# Altium PCB FPV0-3.PcbDoc (part 4 of 6)
Units mm, origin at the board's own origin, x right, y up, seen from the top; angles counter-clockwise.
Board outline 81.28 x 53.34 mm, 4 copper layers (Top Layer, GND Plane 1, 3v3 Plane 2, Bottom Layer); 178 components, 250 nets, 836 pads, 217 vias.
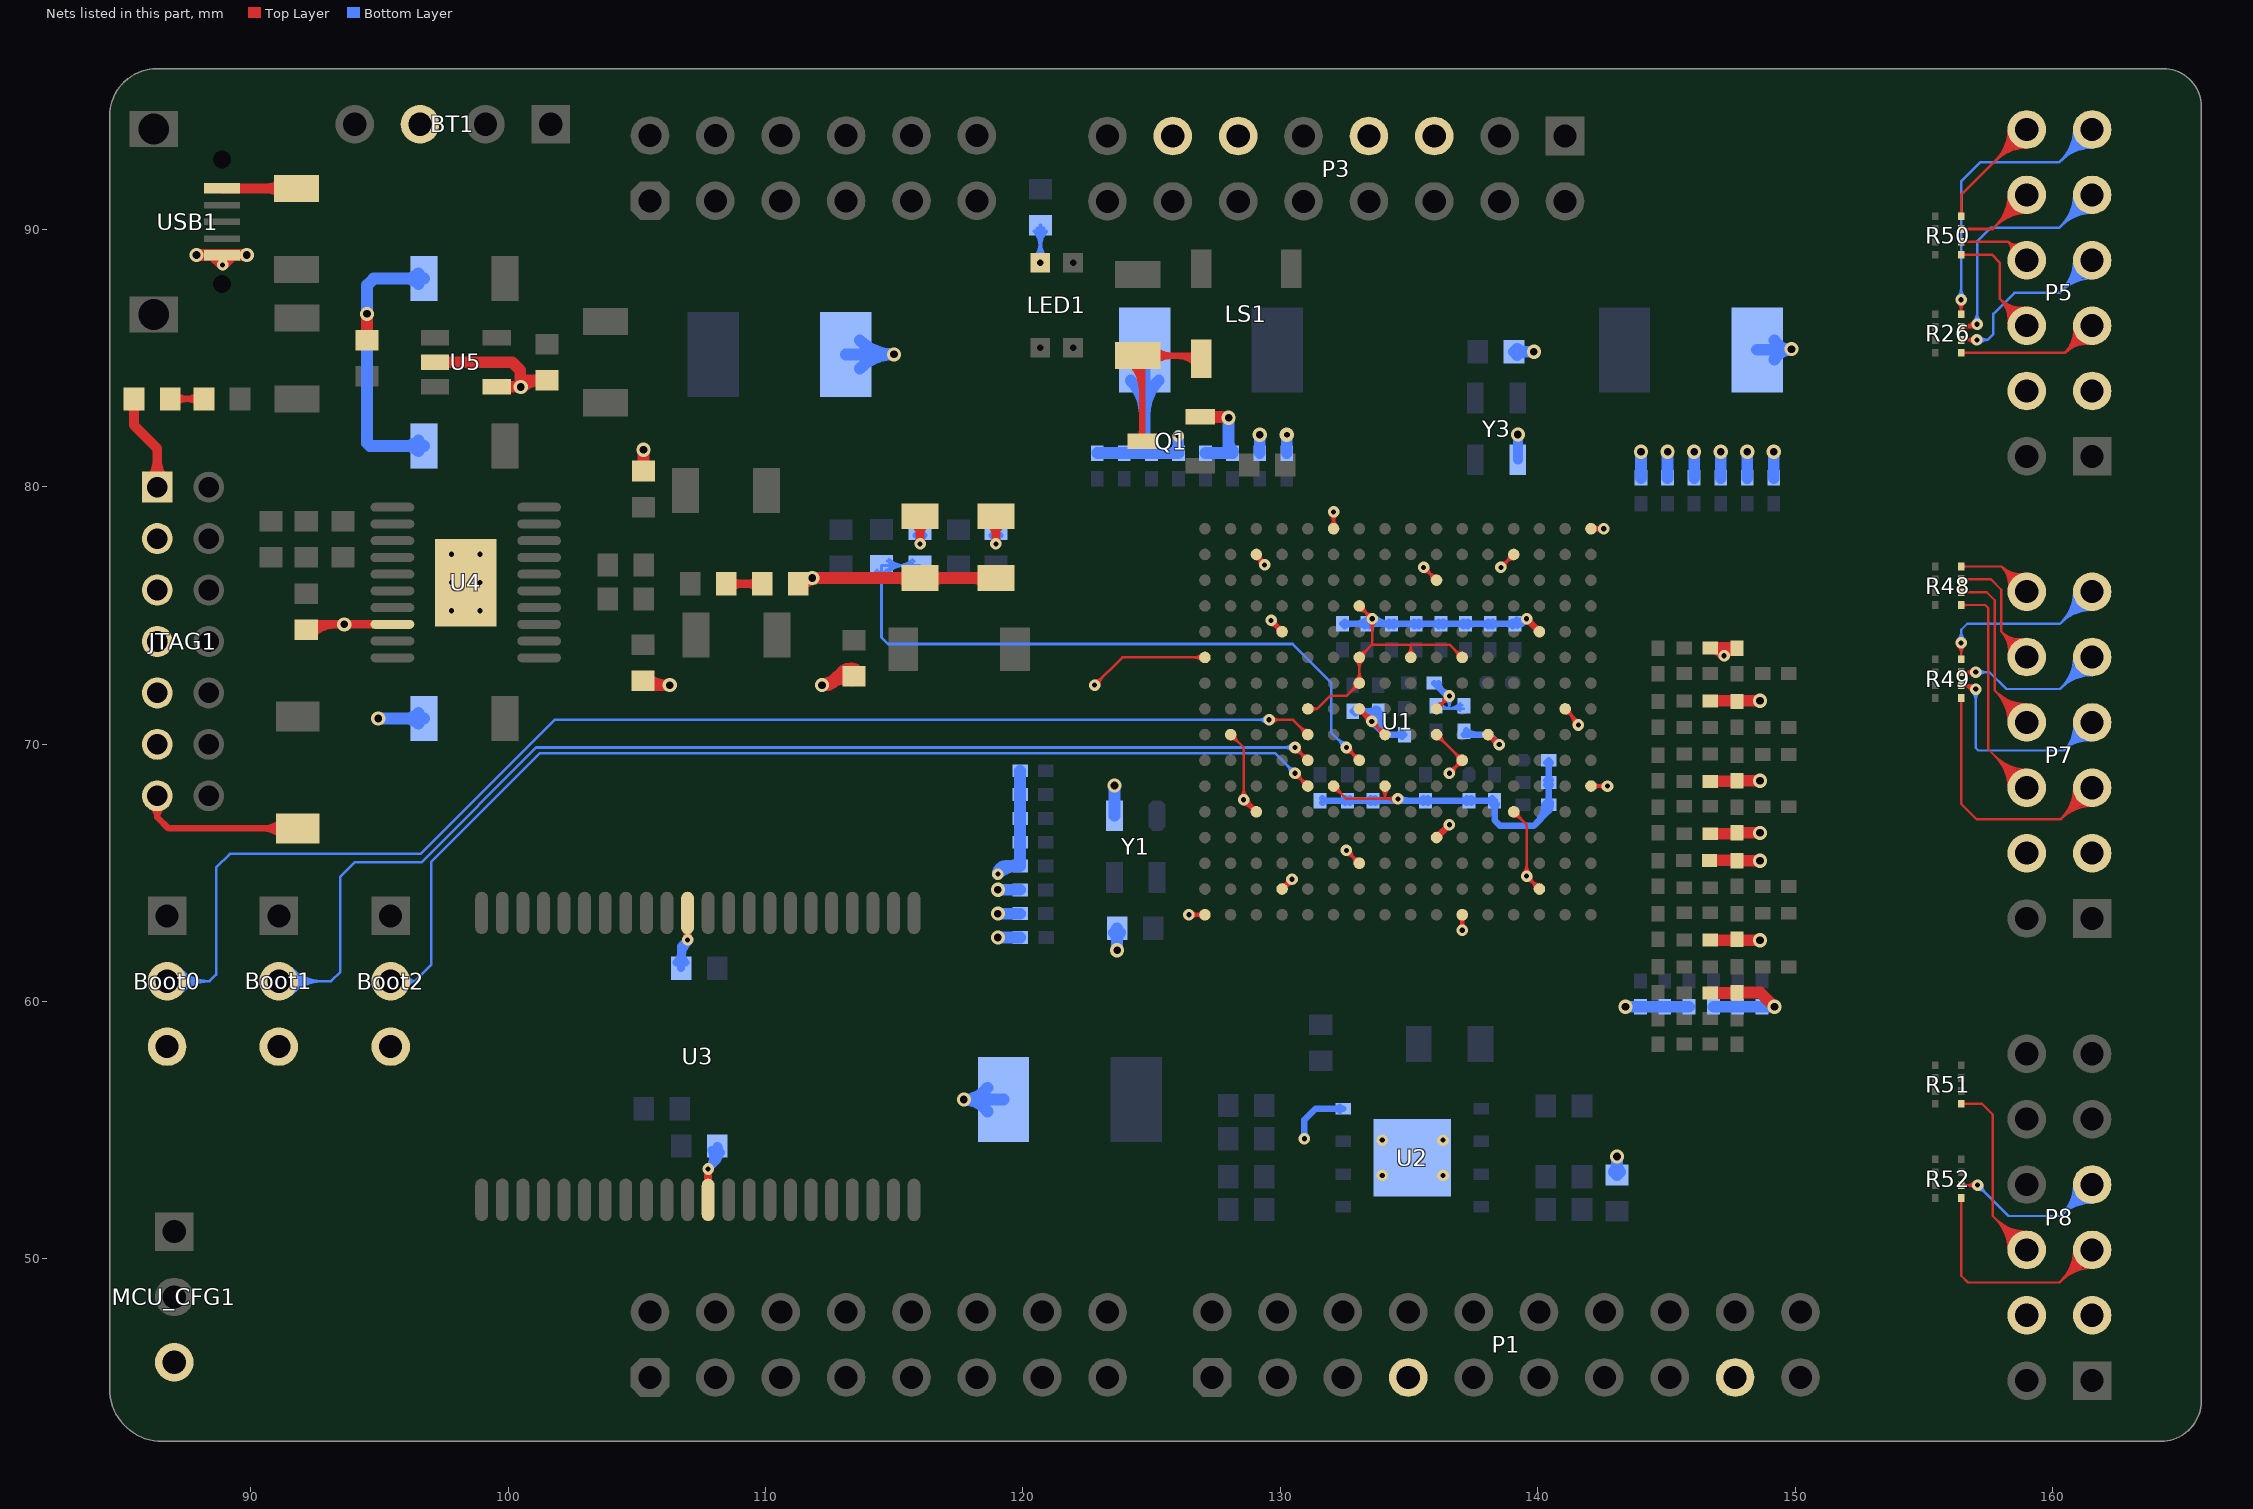
[diagram p6: the nets of this part, all layers, seen from the top]

## Via types
v1: diameter 0.45, hole 0.2, Top Layer to Bottom Layer, tented both sides, 150 vias
v2: diameter 0.55, hole 0.3, Top Layer to Bottom Layer, tented both sides, 55 vias
v3: diameter 0.45, hole 0.2, Top Layer to Bottom Layer, 6 vias
v4: diameter 0.666, hole 0.4, Top Layer to Bottom Layer, tented both sides, 4 vias
v5: diameter 0.513, hole 0.3, Top Layer to Bottom Layer, tented both sides, 1 vias
v6: diameter 0.55, hole 0.23, Top Layer to Bottom Layer, tented both sides, 1 vias

## Nets (pads, with @x,y where several pads share a name; then routed paths per layer and width w, separated by ;. In a path a pad name is that pad's centre, name@x,y a point inside that pad or via, vN(x,y) a via of type N, cw(c..) or ccw(c..) an arc to the next point about the centre after c; other vN are vias at no path point) (continued)
GND: Boot0.3 Boot1.3 Boot2.3 BT1.3 C1.2 C2.1 C3.2 C4.2 C5.2 C6.2 C7.2 C8.1 C9.2 C10.2 C11.2 C12.2 C14.2 C15.2 C16.2 C17.2 C18.2 C19.2 C20.2 C22.2 C23.2 C24.2 C25.2 C26.2 C27.2 C28.1 C29.2 C30.2 C31.2 C32.2 C33.2 C34.2 C35.1 C36.2 C37.2 C38.2 C39.2 C40.2 C41.2 C42.2 C43.2 C44.2 C45.2 C46.2 C47.2 C48.2 C49.2 C50.2 C51.2 C52.2 C53.2 C54.2 C55.2 C56.2 C60.1 C61.2 C62.1 C63.2 C64.2 C65.2 C68.1 D6.1 D7.1 D8.1 FB2.1 JTAG1.1 JTAG1.3 JTAG1.5 JTAG1.7 JTAG1.9 JTAG1.11 JTAG1.13 L1.2 L2.2 MCU_CFG1.3 P1.7 P1.17 P3.5 P3.7 P3.11 P3.13 P5.3 P5.4 P7.3 P7.4 P8.3 P8.4 Q1.2 R4.2 R6.2 R22.2 R23.1 R24.1 R25.1 R27.2 R33.1 R34.1 R38.2 R40.2 R42.1 R46.2 R58.2 R59.1 R60.1 R61.1 R64.1 S5.1 U1.A1 U1.A11 U1.B8 U1.C5 U1.C15 U1.D2 U1.D12 U1.E9 U1.F6 U1.F10 U1.F16 U1.G3 U1.G9 U1.G13 U1.H6 U1.J9 U1.J11 U1.K4 U1.K6 U1.K7 U1.K8 U1.K14 U1.L1 U1.L11 U1.M8 U1.N5 U1.N15 U1.P2 U1.P12 U1.R9 U1.T6 U1.T16 U2.4 U2.9 U3.12 U3.34 U4.8 U4.21 U5.2 U5.4 USB1.5 Y1.2 Y3.2 | length 287.2
  Top Layer w0.089: U1.R9@128.069,70.185 cw(c128.069,69.75) 128.377,70.058 cw(c128.686,70.366) U1.R9@128.25,70.366 ; U1.R9@128.069,70.366 128.575,69.86 v1@128.575,67.86 ; v1@128.447,67.962 ccw(c128.139,68.27) 128.575,68.27 ccw(c129.011,68.27) v1@128.702,67.962
  Top Layer w0.102: v1(122.784,72.288) 123.861,73.366 U1.T6@127.069,73.366 ; v1@122.784,72.463 ccw(c122.784,72.883) 123.081,72.586 ccw(c123.378,72.288) v1@122.958,72.288 ; v1(126.448,63.366) U1.T16@127.069,63.366 ; v1@126.571,63.243 cw(c126.869,62.945) 126.869,63.366 cw(c126.869,63.787) v1@126.571,63.489 ; v1@126.591,63.267 cw(c126.729,63.171) 126.772,63.333 ; v1@126.591,63.465 ccw(c126.729,63.561) 126.772,63.399 ; v1@126.599,63.279 cw(c126.81,63.157) 126.747,63.392 ; v1@126.599,63.453 ccw(c126.81,63.575) 126.747,63.34 ; U1.T16@126.946,63.243 ccw(c126.649,62.945) 126.649,63.366 ccw(c126.649,63.787) U1.T16@126.946,63.489 ; U1.T6@126.946,73.243 ccw(c126.649,72.945) 126.649,73.366 ccw(c126.649,73.787) U1.T6@126.946,73.489 ; v1@128.555,67.661 cw(c128.503,67.2) U1.P12@128.905,67.432 ; v1@128.567,67.762 cw(c128.531,67.449) 128.805,67.607 ; v1@128.575,67.66 cw(c128.575,67.177) U1.P12@128.916,67.519 ; v1@128.575,67.86 U1.P12@129.069,67.366 ; v1@128.62,67.666 cw(c128.685,67.424) 128.81,67.641 ; v1@128.626,67.668 cw(c128.69,67.464) 128.797,67.649 cw(c128.856,67.752) v1@128.742,67.786 ; v1@128.641,67.674 cw(c128.689,67.559) 128.796,67.621 ; v1@128.646,67.85 ccw(c128.936,67.911) 128.788,67.654 ; v1@128.745,67.871 ccw(c129.236,67.975) U1.P12@128.985,67.54 ; v1@128.749,67.834 ccw(c129.107,67.834) 128.854,67.581 ; U1.P12@128.895,67.366 ccw(c128.474,67.366) 128.772,67.663 ccw(c129.069,67.961) U1.P12@129.069,67.54 ; U1.P2@129.069,77.192 cw(c129.069,76.978) 129.22,77.129 ; U1.P2@129.069,77.366 129.069,77.28 v1(129.388,76.962) cw(c129.74,77.315) U1.P2@129.243,77.353 ; U1.P2@129.094,77.202 cw(c128.973,76.993) v1@129.214,76.975 ; U1.P2@129.135,77.286 ccw(c129.393,77.435) v1@129.39,77.136 ; U1.P2@129.142,77.36 ccw(c129.45,77.337) v1@129.231,77.118 ; 129.182,77.151 ccw(c129.288,77.335) v1@129.343,77.13 ; 129.197,77.178 cw(c129.002,77.065) v1@129.219,77.007 ; v1@129.213,76.962 ccw(c128.793,76.962) 129.09,77.259 ccw(c129.388,77.557) v1@129.388,77.136 ; 129.224,77.131 ccw(c129.391,77.227) v1@129.388,77.035 ; v1@129.228,77.032 ccw(c129.144,77.068) 129.19,77.147 ccw(c129.285,77.311) v1@129.338,77.129 ; v1@129.25,77.069 ccw(c129.168,77.133) 129.258,77.186 ccw(c129.349,77.238) v1@129.363,77.135 ; v1@129.623,74.63 cw(c129.583,74.274) U1.N5@129.893,74.453 ; v1@129.634,74.731 cw(c129.611,74.522) 129.793,74.627 ; v1@129.642,74.629 cw(c129.642,74.232) U1.N5@129.922,74.513 ; v1@129.642,74.778 v1@129.642,74.793 ; v1(129.642,74.803) v1@129.642,74.793 ; v1@129.687,74.635 cw(c129.746,74.413) 129.861,74.612 ; v1@129.714,74.808 ccw(c129.932,74.823) 129.823,74.634 ; v1@129.771,74.664 ccw(c130.069,74.962) U1.N5@130.069,74.54 ; v1@129.772,74.663 cw(c129.475,74.366) U1.N5@129.895,74.366 ; v1@129.81,74.758 ccw(c130.075,74.687) 129.837,74.55 ; v1@129.816,74.803 ccw(c130.26,74.803) U1.N5@129.946,74.489 ; v1@129.815,74.815 ccw(c130.162,74.839) U1.N5@129.988,74.538 ; U1.N5@130.069,74.366 v1@129.642,74.793 ; U1.N15@130.069,64.366 130.454,64.751 v1(130.454,64.745) ; U1.N15@130.069,64.54 ccw(c130.069,64.961) 130.367,64.663 ccw(c130.664,64.366) U1.N15@130.243,64.366 ; U1.N15@130.146,64.443 cw(c130.454,64.134) v1@130.454,64.57 ; U1.N15@130.162,64.458 ccw(c129.876,64.745) v1@130.28,64.745 ; U1.N15@130.248,64.457 cw(c130.444,64.344) v1@130.45,64.57 ; U1.N15@130.256,64.472 ccw(c129.997,64.622) v1@130.286,64.7 ; v1@130.28,64.746 cw(c130.049,64.747) 130.165,64.547 cw(c130.321,64.276) v1@130.407,64.577 ; U1.M8@131.069,71.366 131.428,71.366 ; U1.M8@131.206,71.258 cw(c131.428,71.083) 131.428,71.366 ; U1.M8@131.206,71.474 ccw(c131.428,71.649) 131.428,71.366 ; U1.L1@131.946,78.489 ccw(c131.649,78.787) 132.069,78.787 ccw(c132.49,78.787) U1.L1@132.192,78.489 ; v1@131.946,78.896 cw(c131.649,78.599) 132.069,78.599 cw(c132.49,78.599) v1@132.192,78.896 ; U1.L11@132.069,68.192 cw(c132.069,67.771) 132.367,68.069 cw(c132.664,68.366) U1.L11@132.243,68.366 ; U1.L11@132.069,68.366 132.566,67.869 v1@134.566,67.869 ; U1.L1@132.069,78.366 v1(132.069,79.019) ; v1@132.569,65.691 cw(c132.569,65.269) 132.868,65.568 ; v1@132.57,65.866 U1.K14@133.069,65.366 ; v1@132.743,65.866 ccw(c133.162,65.866) 132.866,65.57 ; U1.K14@132.895,65.366 ccw(c132.474,65.366) 132.772,65.663 ccw(c133.069,65.961) U1.K14@133.069,65.54 ; U1.K7@132.895,72.366 cw(c132.474,72.366) 132.772,72.069 cw(c133.069,71.771) U1.K7@133.069,72.192 ; U1.K7@132.946,72.489 ccw(c132.649,72.787) 133.069,72.787 ccw(c133.49,72.787) U1.K7@133.192,72.489 ; U1.K6@132.946,73.243 cw(c132.649,72.945) 133.069,72.945 cw(c133.49,72.945) U1.K6@133.192,73.243 ; U1.K8@133.069,71.192 cw(c133.069,70.771) 133.367,71.069 ; U1.K8@133.069,71.366 v1(133.553,70.882) U1.J9@134.069,70.366 ; U1.K6@133.069,73.54 ccw(c133.069,73.961) 133.367,73.663 ccw(c133.664,73.366) U1.K6@133.243,73.366 ; U1.K4@133.069,75.192 cw(c133.069,74.772) 133.366,75.069 cw(c133.664,75.366) U1.K4@133.243,75.366 ; U1.K4@133.069,75.366 v1(133.569,74.866) 133.569,73.866 133.566,73.863 ; U1.K8@133.144,71.197 cw(c132.9,70.775) v1@133.381,70.854 ; U1.K8@133.238,71.291 ccw(c133.66,71.535) v1@133.581,71.054 ; U1.K8@133.243,71.366 ccw(c133.664,71.366) 133.367,71.069 ; 133.33,71.09 cw(c133.174,70.82) v1@133.482,70.87 ; 133.332,71.088 cw(c133.27,70.979) v1@133.388,70.939 ; 133.345,71.106 ccw(c133.615,71.261) v1@133.565,70.954 ; 133.347,71.103 ccw(c133.456,71.166) v1@133.497,71.047 ; v1@133.379,70.882 ccw(c132.958,70.882) 133.256,71.179 ccw(c133.553,71.477) v1@133.553,71.056 ; v1@133.395,74.866 ccw(c132.974,74.866) 133.272,75.163 ccw(c133.569,75.461) v1@133.569,75.04 ; v1@133.446,74.743 cw(c133.148,74.445) 133.569,74.445 cw(c133.99,74.445) v1@133.692,74.743 ; v1@133.553,70.708 cw(c133.553,70.287) 133.851,70.585 cw(c134.148,70.882) v1@133.727,70.882 ; U1.J9@133.895,70.366 ccw(c133.474,70.366) 133.772,70.663 ccw(c134.069,70.961) U1.J9@134.069,70.54 ; U1.J11@133.946,68.243 cw(c133.649,67.945) 134.069,67.945 cw(c134.49,67.945) U1.J11@134.192,68.243 ; 134.069,67.886 U1.J11@134.069,68.366 ; 134.142,67.869 cw(c134.142,67.439) v1@134.446,67.743 ; 134.155,67.869 ccw(c134.155,68.28) v1@134.446,67.989 ; U1.H6@134.946,73.489 ccw(c134.649,73.787) 135.069,73.787 ccw(c135.49,73.787) U1.H6@135.192,73.489 ; U1.H6@135.069,73.366 135.069,73.863 ; v1@135.569,76.692 cw(c135.569,76.271) 135.866,76.569 cw(c136.164,76.866) v1@135.743,76.866 ; v1(135.569,76.866) U1.G3@136.069,76.366 ; U1.G3@135.895,76.366 ccw(c135.475,76.366) 135.772,76.663 ccw(c136.069,76.961) U1.G3@136.069,76.54 ; U1.G9@136.069,70.192 cw(c136.069,69.771) 136.367,70.069 cw(c136.664,70.366) U1.G9@136.243,70.366 ; U1.G9@136.069,70.366 U1.F10@137.069,69.366 ; v1(136.569,68.866) U1.F10@137.069,69.366 ; v1@136.569,69.04 ccw(c136.569,69.461) 136.866,69.163 ccw(c137.164,68.866) v1@136.743,68.866 ; U1.F6@136.895,73.366 ccw(c136.474,73.366) 136.772,73.663 ccw(c137.069,73.961) U1.F6@137.069,73.54 ; v1@136.946,62.887 ccw(c136.649,63.184) 137.069,63.184 ccw(c137.49,63.184) v1@137.192,62.887 ; U1.F16@136.946,63.243 cw(c136.649,62.945) 137.069,62.945 cw(c137.49,62.945) U1.F16@137.192,63.243 ; v1@136.971,62.907 ccw(c136.883,63.036) 137.034,63.077 ; v1@136.982,62.914 ccw(c136.852,63.139) 137.103,63.072 ; 137.035,63.072 ccw(c137.286,63.139) v1@137.156,62.914 ; v1(137.069,62.763) U1.F16@137.069,63.366 ; U1.F10@137.069,69.192 ccw(c137.069,68.771) 136.771,69.068 ccw(c136.475,69.366) 136.895,69.366 ccw(c136.474,69.366) 136.772,69.663 ccw(c137.069,69.961) U1.F10@137.069,69.54 ; U1.F6@137.069,73.366 136.572,73.863 133.566,73.863 ; 137.104,63.077 ccw(c137.255,63.036) v1@137.167,62.907 ; U1.E9@138.069,70.192 cw(c138.069,69.655) v1@138.449,70.035 ; U1.E9@138.069,70.293 cw(c138.069,70.002) 138.275,70.208 ; U1.E9@138.069,70.366 138.117,70.366 v1(138.506,69.977) ; U1.E9@138.235,70.319 ccw(c138.527,70.487) v1@138.513,70.151 ; U1.E9@138.243,70.366 ccw(c138.548,70.366) 138.333,70.151 ; 138.314,70.182 ccw(c138.403,70.233) v1@138.441,70.139 ; 138.328,70.159 ccw(c138.518,70.269) v1@138.509,70.05 ; v1@138.332,69.964 ccw(c138.062,69.945) 138.197,70.18 ccw(c138.371,70.479) v1@138.461,70.145 ; v1@138.332,69.977 ccw(c137.911,69.977) 138.209,70.274 ccw(c138.506,70.572) v1@138.506,70.151 ; v1(138.569,76.866) U1.D2@139.069,77.366 ; v1@138.569,77.04 ccw(c138.569,77.46) 138.866,77.163 ccw(c139.164,76.866) v1@138.743,76.866 ; U1.D2@138.895,77.366 cw(c138.474,77.366) 138.772,77.069 cw(c139.069,76.771) U1.D2@139.069,77.192 ; U1.D12@139.069,67.192 cw(c139.069,66.771) 139.367,67.069 cw(c139.664,67.366) U1.D12@139.243,67.366 ; U1.D12@139.069,67.366 139.569,66.866 v1(139.569,64.866) U1.C15@140.069,64.366 ; v1@139.446,64.989 ccw(c139.149,65.287) 139.569,65.287 ccw(c139.99,65.287) v1@139.692,64.989 ; v1@139.569,64.692 cw(c139.569,64.271) 139.867,64.569 cw(c140.164,64.866) v1@139.743,64.866 ; U1.C15@139.895,64.366 ccw(c139.474,64.366) 139.772,64.663 ccw(c140.069,64.961) U1.C15@140.069,64.54 ; U1.B8@141.069,71.192 cw(c141.069,70.771) 141.367,71.069 cw(c141.664,71.366) U1.B8@141.243,71.366 ; U1.B8@141.069,71.366 v1@141.58,70.856 ; U1.B8@141.2,71.235 cw(c140.703,70.739) v1@141.405,70.739 ; 141.373,71.062 cw(c141.05,70.739) v1@141.507,70.739 ; 141.481,70.954 ccw(c141.58,71.052) v1@141.58,70.913 ; U1.A11@142.069,68.366 v1(142.712,68.366) ; U1.A1@142.069,78.366 v1(142.569,78.366) ; U1.A11@142.192,68.243 cw(c142.49,67.945) 142.49,68.366 cw(c142.49,68.787) U1.A11@142.192,68.489 ; U1.A1@142.192,78.243 cw(c142.49,77.945) 142.49,78.366 cw(c142.49,78.787) U1.A1@142.192,78.489 ; 142.376,68.335 cw(c142.422,68.161) v1@142.57,68.265 ; 142.376,68.397 ccw(c142.422,68.571) v1@142.57,68.467 ; v1@142.4,78.325 ccw(c142.283,78.297) 142.314,78.413 ccw(c142.338,78.505) v1@142.42,78.456 ; v1@142.4,78.407 cw(c142.283,78.435) 142.314,78.319 cw(c142.338,78.227) v1@142.42,78.276 ; 142.425,68.349 ccw(c142.367,68.565) v1@142.561,68.453 ; 142.425,68.383 cw(c142.367,68.167) v1@142.561,68.279 ; v1@142.446,78.243 ccw(c142.148,77.945) 142.148,78.366 ccw(c142.148,78.787) v1@142.446,78.489 ; v1@142.589,68.243 ccw(c142.291,67.945) 142.291,68.366 ccw(c142.291,68.787) v1@142.589,68.489 ; 131.428,71.366 131.944,71.882 132.585,71.882 U1.K7@133.069,72.366 U1.K6@133.069,73.366 133.566,73.863 ; 133.366,71.069 cw(c133.204,70.976) 133.385,70.927 ccw(c133.204,70.976) 133.366,71.069 ; 133.366,71.069 ccw(c133.46,71.231) 133.508,71.05 cw(c133.46,71.231) 133.366,71.069 ; v1@128.743,67.789 ccw(c128.869,67.756) 128.756,67.691 cw(c128.869,67.756) v1@128.743,67.789 ; 138.318,70.177 cw(c138.141,70.075) 138.338,70.022 ccw(c138.141,70.075) 138.318,70.177
  Top Layer w0.254: JTAG1.13@86.12,67.577 cw(c85.874,67.158) 86.36,67.158 ; JTAG1.13@86.36,67.985 86.36,67.158 ; JTAG1.13@86.6,67.577 ccw(c86.846,67.158) 86.36,67.158 ; S5.1@91.229,66.402 ccw(c90.464,65.638) 90.464,66.719 ccw(c90.464,67.801) S5.1@91.229,67.036 ; S5.1@91.821,66.719 86.798,66.719 86.36,67.158 ; U1.G13@136.069,66.366 v1(136.569,66.866) ; U1.G13@136.069,66.464 ccw(c136.069,66.701) 136.236,66.533 ccw(c136.404,66.366) U1.G13@136.167,66.366 ; 136.402,66.698 ccw(c136.234,66.866) v1@136.471,66.866 ; 136.402,66.699 cw(c136.569,66.532) v1@136.569,66.768 ; v1@139.569,74.768 cw(c139.569,74.531) 139.736,74.699 cw(c139.904,74.866) v1@139.667,74.866 ; v1(139.569,74.866) U1.C5@140.069,74.366 ; 139.902,74.533 cw(c139.735,74.366) U1.C5@139.971,74.366 ; 139.902,74.533 ccw(c140.069,74.701) U1.C5@140.069,74.464
  Top Layer w0.305: v1@106.966,62.465 U3.34@106.966,63.436 ; U3.12@107.766,52.286 v1(107.766,53.486)
  Top Layer w0.33: R27.2@92.367,74.267 cw(c93.295,73.34) 93.295,74.651 ; R27.2@92.369,74.651 U4.8@95.499,74.651
  Top Layer w0.381: R34.1@85.309,83.215 cw(c84.951,82.858) 85.457,82.858 cw(c85.963,82.858) R34.1@85.605,83.215 ; R34.1@85.457,83.414 85.457,82.386 86.36,81.483 JTAG1.1@86.36,79.985 ; JTAG1.1@86.07,80.274 ccw(c85.371,80.973) 86.36,80.973 ccw(c87.349,80.973) JTAG1.1@86.65,80.274
  Top Layer w0.457: v2(87.884,89.002) USB1.5@88.519,89.002 ; USB1.5@88.875,88.992 USB1.5@88.9,88.967 ; v2(89.84,89.002) USB1.5@89.281,89.002 ; C62.1@94.392,85.81 ccw(c94.1,86.102) 94.513,86.102 ccw(c94.927,86.102) C62.1@94.635,85.81 ; C62.1@94.513,85.688 v2(94.513,86.716) ; U5.2@97.149,84.836 100.152,84.836 100.467,84.521 100.467,84.084 100.519,84.136 C63.2@101.498,84.136 ; U5.4@99.549,83.886 v2@100.467,83.886 ; v2@100.515,83.838 cw(c101.235,83.119) C63.2@101.235,84.136 ; C63.2@101.327,84.015 ccw(c101.035,83.722) 101.035,84.136 ccw(c101.035,84.55) C63.2@101.327,84.257 ; C64.2@105.136,80.73 ccw(c104.844,81.022) 105.258,81.022 ccw(c105.671,81.022) C64.2@105.379,80.73 ; C64.2@105.258,80.608 v2(105.258,81.432) ; C65.2@105.396,72.288 v2(106.274,72.288) ; C65.2@105.403,72.573 ccw(c106.091,73.261) v2@106.091,72.288 ; R42.1@111.387,76.154 cw(c112.096,75.445) 112.096,76.448 ; R42.1@111.489,76.448 L2.2@116.002,76.448 L1.2@118.948,76.448 ; v2(112.192,72.288) v2@112.446,72.288 ; v2@112.192,72.335 ccw(c112.192,73.06) 112.705,72.547 ; v2@112.204,72.333 ccw(c112.345,72.86) 112.618,72.388 ; 112.938,72.781 cw(c113.302,72.417) R33.1@113.491,72.896 ; R33.1@113.265,72.509 ccw(c112.973,72.216) 112.973,72.63 ccw(c112.973,73.044) R33.1@113.265,72.751 ; R33.1@113.323,72.47 ccw(c113.023,71.711) v2@112.446,72.288 ; R33.1@113.436,72.63 112.787,72.63 v2@112.446,72.288 ; L2.2@115.585,76.256 ccw(c115.122,75.793) 115.122,76.448 ccw(c115.122,77.103) L2.2@115.585,76.64 ; L2.2@116.419,76.256 cw(c116.882,75.793) 116.882,76.448 cw(c116.882,77.103) L2.2@116.419,76.64 ; L1.2@118.531,76.256 ccw(c118.068,75.793) 118.068,76.448 ccw(c118.068,77.103) L1.2@118.531,76.64 ; Q1.2@126.88,82.713 v2@127.955,82.713 ; R46.2@146.677,65.481 R61.1@147.737,65.481 ; R22.2@146.702,60.325 R25.1@147.736,60.325 ; R6.2@146.702,62.378 v2(148.641,62.378) ; R4.2@146.702,66.513 R23.1@147.717,66.513 ; R40.2@146.702,68.549 147.73,68.549 R60.1@147.752,68.571 ; R38.2@146.702,71.679 v2(148.641,71.679) ; v1@147.241,73.433 cw(c147.752,73.154) 147.752,73.736 R58.2@146.702,73.736 cw(c146.702,73.095) v1@147.247,73.433 ; R25.1@147.752,60.341 148.65,60.341 v2(149.2,59.792) ; R61.1@147.752,65.467 v2(148.641,65.467) ; R23.1@147.752,66.548 v2(148.641,66.548) ; R60.1@147.787,68.605 R60.1@147.752,68.571 ; v2(148.641,68.571) R60.1@147.752,68.571 ; USB1.5@88.519,89.002 USB1.5@89.281,89.002 ; USB1.5@88.519,89.002 v1(88.9,88.621) USB1.5@89.281,89.002
  Bottom Layer w0.254: v1@130.868,54.73 ccw(c130.7,54.897) 130.937,54.897 ccw(c131.174,54.897) v1@131.006,54.73 ; v1(130.937,54.661) 130.937,55.397 131.369,55.829 U2.4@132.453,55.829 ; C4.2@131.634,67.714 cw(c131.844,67.504) 131.844,67.801 cw(c131.844,68.098) C4.2@131.634,67.888 ; C4.2@131.643,67.724 cw(c131.801,67.6) 131.801,67.801 ; C4.2@131.643,67.877 ccw(c131.801,68.001) 131.801,67.801 ; U2.4@132.309,55.76 ccw(c132.141,55.593) 132.141,55.829 ccw(c132.141,56.066) U2.4@132.309,55.898 ; C10.2@132.41,74.668 C15.2@133.368,74.668 C9.2@134.326,74.668 C18.2@135.284,74.668 C14.2@136.242,74.668 C22.2@137.2,74.668 C19.2@138.158,74.668 C6.2@139.116,74.668 ; C10.2@132.497,74.581 cw(c132.707,74.371) 132.707,74.668 cw(c132.707,74.965) C10.2@132.497,74.755 ; C20.2@132.526,67.714 ccw(c132.316,67.504) 132.316,67.801 ccw(c132.316,68.098) C20.2@132.526,67.888 ; C20.2@132.7,67.714 cw(c132.91,67.504) 132.91,67.801 cw(c132.91,68.098) C20.2@132.7,67.888 ; C28.1@132.817,71.28 133.553,71.28 ; 132.854,74.668 ccw(c132.854,75.581) C15.2@133.5,74.935 ; C28.1@132.904,71.193 cw(c133.114,70.983) 133.114,71.28 cw(c133.114,71.577) C28.1@132.904,71.367 ; C15.2@133.281,74.581 ccw(c133.071,74.371) 133.071,74.668 ccw(c133.071,74.965) C15.2@133.281,74.755 ; C15.2@133.455,74.581 cw(c133.665,74.371) 133.665,74.668 cw(c133.665,74.965) C15.2@133.455,74.755 ; v1@133.484,70.951 ccw(c133.317,71.119) 133.553,71.119 ccw(c133.79,71.119) v1@133.622,70.951 ; v1@133.488,70.955 ccw(c133.083,71.413) C35.1@133.693,71.376 ; C7.2@133.517,67.714 ccw(c133.307,67.504) 133.307,67.801 ccw(c133.307,68.098) C7.2@133.517,67.888 ; C15.2@133.535,74.633 ccw(c133.468,74.882) v1@133.723,74.841 ; v1@133.538,70.785 cw(c133.473,70.371) 133.832,70.587 ; v1@133.553,70.784 cw(c133.553,70.547) 133.72,70.715 cw(c133.888,70.882) v1@133.651,70.882 ; v1@133.553,70.799 cw(c133.865,70.799) C35.1@133.824,71.109 ; v1@133.553,71.09 cw(c133.826,71.09) C35.1@133.79,71.36 ; C35.1@133.566,71.136 ccw(c133.741,71.089) v1@133.619,70.955 ; v1@133.638,74.935 ccw(c134.284,75.581) C9.2@134.284,74.668 ; C35.1@133.688,71.284 ccw(c134.225,71.043) 133.809,70.627 ; C7.2@133.691,67.714 cw(c133.901,67.504) 133.901,67.801 cw(c133.901,68.098) C7.2@133.691,67.888 ; C35.1@133.72,71.193 ccw(c133.51,70.983) 133.51,71.28 ccw(c133.51,71.577) C35.1@133.72,71.367 ; C35.1@133.807,71.28 133.553,71.28 ; C35.1@133.919,71.18 ccw(c134.585,70.882) 134.069,70.366 ; 134.175,67.801 ccw(c134.175,68.26) v1@134.5,67.935 ; C9.2@134.239,74.581 ccw(c134.029,74.371) 134.029,74.668 ccw(c134.029,74.965) C9.2@134.239,74.755 ; C9.2@134.413,74.581 cw(c134.623,74.371) 134.623,74.668 cw(c134.623,74.965) C9.2@134.413,74.755 ; v1@134.638,67.935 ccw(c134.963,68.26) 134.963,67.801 ; FB2.1@134.736,70.279 ccw(c134.526,70.069) 134.526,70.366 ccw(c134.526,70.663) FB2.1@134.736,70.453 ; FB2.1@134.823,70.366 134.069,70.366 ; C18.2@135.197,74.581 ccw(c134.987,74.371) 134.987,74.668 ccw(c134.987,74.965) C18.2@135.197,74.755 ; C18.2@135.371,74.581 cw(c135.581,74.371) 135.581,74.668 cw(c135.581,74.965) C18.2@135.371,74.755 ; C17.2@135.549,67.714 ccw(c135.339,67.504) 135.339,67.801 ccw(c135.339,68.098) C17.2@135.549,67.888 ; C17.2@135.723,67.714 cw(c135.933,67.504) 135.933,67.801 cw(c135.933,68.098) C17.2@135.723,67.888 ; C14.2@136.155,74.581 ccw(c135.945,74.371) 135.945,74.668 ccw(c135.945,74.965) C14.2@136.155,74.755 ; C14.2@136.329,74.581 cw(c136.539,74.371) 136.539,74.668 cw(c136.539,74.965) C14.2@136.329,74.755 ; C22.2@137.113,74.581 ccw(c136.903,74.371) 136.903,74.668 ccw(c136.903,74.965) C22.2@137.113,74.755 ; C8.1@137.135,70.366 138.117,70.366 v1(138.506,69.977) ; C8.1@137.222,70.53 ccw(c137.617,70.926) 137.617,70.366 ; C23.2@137.251,67.714 ccw(c137.041,67.504) 137.041,67.801 ccw(c137.041,68.098) C23.2@137.251,67.888 ; C22.2@137.287,74.581 cw(c137.497,74.371) 137.497,74.668 cw(c137.497,74.965) C22.2@137.287,74.755 ; C23.2@137.425,67.714 cw(c137.635,67.504) 137.635,67.801 cw(c137.635,68.098) C23.2@137.425,67.888 ; C19.2@138.071,74.581 ccw(c137.861,74.371) 137.861,74.668 ccw(c137.861,74.965) C19.2@138.071,74.755 ; C12.2@138.241,67.664 cw(c138.031,67.454) 138.328,67.454 cw(c138.625,67.454) C12.2@138.415,67.664 ; C12.2@138.241,67.714 ccw(c138.031,67.504) 138.031,67.801 ccw(c138.031,68.098) C12.2@138.241,67.888 ; C19.2@138.245,74.581 cw(c138.455,74.371) 138.455,74.668 cw(c138.455,74.965) C19.2@138.245,74.755 ; v1@138.408,69.977 ccw(c138.172,69.977) 138.339,70.144 ccw(c138.506,70.312) v1@138.506,70.075 ; C6.2@139.029,74.581 ccw(c138.819,74.371) 138.819,74.668 ccw(c138.819,74.965) C6.2@139.029,74.755 ; C6.2@139.181,74.822 ccw(c139.348,75.087) v1(139.569,74.866) 139.371,74.668 ; C6.2@139.212,74.591 cw(c139.371,74.465) 139.371,74.668 ; C6.2@139.212,74.745 ccw(c139.371,74.871) 139.371,74.668 ; v1@139.479,74.905 cw(c139.116,75.065) C6.2@139.116,74.668 ; 139.965,66.94 ccw(c139.265,67.64) C3.2@140.256,67.64 ; C3.2@140.342,67.727 ccw(c140.132,67.937) 140.429,67.937 ccw(c140.726,67.937) C3.2@140.516,67.727 ; C11.2@140.342,68.417 cw(c140.132,68.207) 140.429,68.207 cw(c140.726,68.207) C11.2@140.516,68.417 ; C11.2@140.342,68.591 ccw(c140.132,68.801) 140.429,68.801 ccw(c140.726,68.801) C11.2@140.516,68.591 ; C16.2@140.342,69.28 cw(c140.132,69.07) 140.429,69.07 cw(c140.726,69.07) C16.2@140.516,69.28 ; 140.399,67.373 ccw(c140.132,67.64) C3.2@140.51,67.64 ; C16.2@140.429,69.367 C11.2@140.429,68.504 C3.2@140.429,67.64 140.429,67.403 139.853,66.827 138.532,66.827 138.328,67.031 C12.2@138.328,67.801 C23.2@137.338,67.801 C17.2@135.636,67.801 C7.2@133.604,67.801 C20.2@132.613,67.801 131.801,67.801 ; 133.553,71.28 cw(c133.553,71.08) 133.711,71.204 ccw(c133.553,71.08) 133.553,71.28 ; 133.553,71.28 ccw(c133.553,71.481) 133.711,71.357 cw(c133.553,71.481) 133.553,71.28 ; 133.553,71.28 v1(133.553,70.882) 134.069,70.366 ; C6.2@139.116,74.668 139.371,74.668
  Bottom Layer w0.305: C61.2@106.542,61.515 ccw(c106.119,61.938) 106.717,61.938 ccw(c107.314,61.938) C61.2@106.892,61.515 ; C61.2@106.717,61.29 106.717,62.14 v1(106.966,62.389) ; C61.2@106.717,61.612 cw(c107.743,61.612) v1@107.017,62.337 ; 106.717,62.036 cw(c106.998,62.036) v1@106.972,62.317 ; C60.1@107.893,54.225 cw(c107.306,53.946) v1(107.766,53.486) 108.117,53.837 ; C60.1@107.968,54.133 cw(c107.746,53.837) 108.117,53.837 ; 108.071,53.791 ccw(c107.72,54.142) C60.1@108.168,54.356 ; C60.1@108.117,54.381 108.117,53.837 ; C60.1@108.265,54.133 ccw(c108.487,53.837) 108.117,53.837
  Bottom Layer w0.381: Y3.2@139.23,81.045 v2(139.23,82.029)
  Bottom Layer w0.457: v2(94.945,70.993) D8.1@96.723,70.993 ; D8.1@96.513,70.783 ccw(c96.007,70.277) 96.007,70.993 ccw(c96.007,71.709) D8.1@96.513,71.203 ; D7.1@96.513,81.375 ccw(c96.007,80.869) 96.007,81.585 ccw(c96.007,82.3) D7.1@96.513,81.794 ; D6.1@96.513,87.878 ccw(c96.007,87.372) 96.007,88.087 ccw(c96.007,88.803) D6.1@96.513,88.297 ; D7.1@96.723,81.585 94.615,81.585 94.513,81.686 v2(94.513,86.716) 94.513,87.833 94.767,88.087 D6.1@96.723,88.087 ; C5.2@113.116,85.141 v2(114.986,85.141) ; C5.2@113.661,84.595 cw(c114.978,83.278) 114.978,85.141 cw(c114.978,87.003) C5.2@113.661,85.686 ; C50.2@118.626,55.723 ccw(c117.704,55.034) v2(117.704,56.185) ; C50.2@118.626,56.647 cw(c117.704,57.336) v2(117.704,56.185) ; v1@119.021,64.948 cw(c119.336,64.944) 119.336,65.26 ; v1@119.022,64.95 cw(c119.769,64.203) C45.2@119.769,65.26 ; v2(119.024,62.484) C55.2@119.896,62.484 ; v2(119.024,63.409) C53.2@119.888,63.409 ; v2(119.024,64.335) C49.2@119.888,64.335 ; v1(119.024,64.948) 119.336,65.26 ; C50.2@119.243,56.185 v2(117.704,56.185) ; C27.2@119.888,68.961 C32.2@119.888,68.036 C37.2@119.888,67.11 C41.2@119.888,66.185 C45.2@119.888,65.26 119.336,65.26 ; C26.2@122.885,81.305 C54.2@123.937,81.305 C52.2@124.99,81.305 C48.2@126.042,81.305 126.035,81.313 v1(126.035,81.966) ; C2.1@123.537,62.668 cw(c123.245,62.376) 123.658,62.376 cw(c124.072,62.376) C2.1@123.78,62.668 ; Y1.2@123.558,67.215 v2(123.558,68.389) ; v2(123.658,61.987) C2.1@123.658,62.84 ; C51.2@124.184,84.123 cw(c122.867,82.806) 124.73,82.806 cw(c126.592,82.806) C51.2@125.275,84.123 ; 124.73,81.347 C51.2@124.73,85.319 ; 124.73,82.035 ccw(c125.669,82.035) C52.2@125.005,81.371 ; C44.2@127.094,81.305 C40.2@128.147,81.305 ; C40.2@127.991,81.432 v2(127.991,82.677) ; 127.991,81.784 ccw(c128.575,81.784) C40.2@128.162,81.371 ; C36.2@129.199,81.305 v2(129.199,82.017) ; C31.2@130.251,81.305 v6(130.251,82.017) ; C68.1@139.079,85.242 v2(139.852,85.242) ; C68.1@139.2,85.121 cw(c139.493,84.829) 139.493,85.242 cw(c139.493,85.656) C68.1@139.2,85.364 ; C1.2@142.957,53.374 ccw(c142.664,53.666) 143.078,53.666 ccw(c143.492,53.666) C1.2@143.199,53.374 ; C1.2@143.078,53.253 v2(143.078,53.975) ; v2(143.408,59.792) C29.2@144.937,59.792 C33.2@145.882,59.792 ; C47.2@144.018,80.34 v2(144.018,81.356) ; C43.2@145.049,80.34 v2(145.049,81.356) ; C39.2@146.08,80.34 v2(146.08,81.356) ; C38.2@146.827,59.792 C42.2@147.772,59.792 C46.2@148.717,59.792 v2(149.2,59.792) ; C34.2@147.112,80.34 v2(147.112,81.356) ; C30.2@148.143,80.34 v2(148.143,81.356) ; C56.2@148.523,85.319 v2@149.835,85.319 ; C25.2@149.174,80.34 v2(149.174,81.356) ; C56.2@149.198,84.944 cw(c149.835,84.59) v2@149.835,85.319 ; C56.2@149.198,85.693 ccw(c149.835,86.047) v2@149.835,85.319
  other v1: 133.96,53.238 136.322,53.238 133.96,54.61 136.322,54.61 132.569,65.866 128.575,67.834 134.569,67.866 141.58,70.739 147.244,73.431
  other v2: 93.624,74.651 111.811,76.448 100.482,83.871 149.86,85.344
  other v3: 97.799,75.176 98.899,75.176 97.799,76.276 98.899,76.276 97.799,77.376 98.899,77.376
INIT: R1.2 R11.1 U1.K10 | length 34.7
  Top Layer w0.102: v1@132.569,69.691 cw(c132.569,69.271) 132.866,69.568 cw(c133.164,69.866) v1@132.743,69.866 ; v1(132.569,69.866) U1.K10@133.069,69.366 ; 132.77,69.664 ccw(c133.069,69.963) U1.K10@133.069,69.54 ; 132.772,69.662 cw(c132.476,69.366) U1.K10@132.895,69.366
  Bottom Layer w0.102: R11.1@114.256,76.69 cw(c113.66,76.094) 114.503,76.094 cw(c115.346,76.094) R11.1@114.75,76.69 ; R11.1@114.328,76.762 cw(c113.905,76.339) 114.503,76.339 cw(c115.101,76.339) R11.1@114.678,76.762 ; R11.1@114.728,76.762 cw(c115.151,76.339) 115.151,76.937 cw(c115.151,77.534) R11.1@114.728,77.112 ; R11.1@114.8,76.69 cw(c115.396,76.094) 115.396,76.937 cw(c115.396,77.78) R11.1@114.8,77.184 ; 115.074,76.937 cw(c115.074,76.045) R1.2@115.705,76.675 ; 115.143,76.937 ccw(c115.143,77.731) R1.2@115.705,77.169 ; 115.32,76.937 cw(c115.32,76.29) R1.2@115.777,76.747 ; 115.388,76.937 ccw(c115.388,77.486) R1.2@115.777,77.097 ; R1.2@115.988,76.937 R11.1@114.503,76.937 114.503,74.143 114.757,73.889 130.478,73.889 131.978,72.388 131.978,70.456 v1(132.569,69.866) ; v1@132.395,69.866 ccw(c131.974,69.866) 132.271,70.163 ccw(c132.569,70.46) v1@132.569,70.04
MODE0: Boot0.2 U1.M9 | length 61.2
  Top Layer w0.102: v1(129.565,70.942) 130.493,70.942 U1.M9@131.069,70.366 ; v1@129.688,70.819 cw(c129.986,70.522) 129.986,70.942 cw(c129.986,71.363) v1@129.688,71.065 ; U1.M9@130.895,70.366 ccw(c130.474,70.366) 130.772,70.663 ccw(c131.069,70.961) U1.M9@131.069,70.54
  Bottom Layer w0.102: Boot0.2@86.741,60.782 88.392,60.782 ; Boot0.2@87.024,60.508 cw(c87.672,59.88) 87.672,60.782 cw(c87.672,61.684) Boot0.2@87.024,61.057 ; Boot0.2@87.097,60.437 cw(c87.912,59.648) 87.912,60.782 cw(c87.912,61.917) Boot0.2@87.097,61.127 ; Boot0.2@87.17,60.366 cw(c88.152,59.415) 88.152,60.782 cw(c88.152,62.149) Boot0.2@87.17,61.198 ; Boot0.2@87.243,60.296 cw(c88.392,59.183) 88.392,60.782 ; Boot0.2@87.243,61.269 ccw(c88.392,62.382) 88.392,60.782 ; v1@129.442,70.819 ccw(c129.144,70.522) 129.144,70.942 ccw(c129.144,71.363) v1@129.442,71.065 ; v1(129.565,70.942) 101.803,70.942 96.596,65.735 89.179,65.735 88.646,65.202 88.646,61.036 88.392,60.782
MODE1: Boot1.2 U1.M10 | length 56.4
  Top Layer w0.102: v1@130.569,69.691 cw(c130.569,69.269) 130.868,69.568 ; v1(130.569,69.866) U1.M10@131.069,69.366 ; v1@130.743,69.866 ccw(c131.162,69.866) 130.866,69.57 ; U1.M10@130.895,69.366 ccw(c130.474,69.366) 130.772,69.663 ccw(c131.069,69.961) U1.M10@131.069,69.54
  Bottom Layer w0.102: Boot1.2@91.084,60.782 93.116,60.782 93.472,61.138 93.472,64.846 94.031,65.405 96.625,65.405 101.086,69.866 v1(130.569,69.866) ; Boot1.2@91.363,60.503 cw(c92.037,59.83) 92.037,60.782 cw(c92.037,61.734) Boot1.2@91.363,61.061 ; Boot1.2@91.435,60.431 cw(c92.282,59.585) 92.282,60.782 cw(c92.282,61.98) Boot1.2@91.435,61.133 ; Boot1.2@91.507,60.36 cw(c92.527,59.339) 92.527,60.782 cw(c92.527,62.225) Boot1.2@91.507,61.205 ; Boot1.2@91.579,60.288 cw(c92.772,59.094) 92.772,60.782 cw(c92.772,62.47) Boot1.2@91.579,61.277 ; v1@130.446,69.742 ccw(c130.148,69.445) 130.148,69.866 ccw(c130.148,70.286) v1@130.446,69.989
MODE2: Boot2.2 U1.M11 | length 45.5
  Top Layer w0.102: v1@130.569,68.691 cw(c130.569,68.271) 130.866,68.568 cw(c131.164,68.866) v1@130.743,68.866 ; v1(130.569,68.866) U1.M11@131.069,68.366 ; 130.77,68.664 ccw(c131.069,68.963) U1.M11@131.069,68.54 ; 130.772,68.662 cw(c130.476,68.366) U1.M11@130.895,68.366
  Bottom Layer w0.102: Boot2.2@95.428,60.782 96.368,60.782 ; Boot2.2@96,60.61 cw(c96.231,60.541) 96.231,60.782 cw(c96.231,61.023) Boot2.2@96,60.954 ; Boot2.2@96.098,60.581 cw(c96.368,60.5) 96.368,60.782 ; Boot2.2@96.098,60.983 ccw(c96.368,61.064) 96.368,60.782 ; v1@130.395,68.866 ccw(c129.974,68.866) 130.271,69.163 ccw(c130.569,69.46) v1@130.569,69.04 ; v1(130.569,68.866) 129.788,69.647 101.226,69.647 97.003,65.423 97.003,61.417 96.368,60.782
NetC8_2: C8.2 C13.1 FB1.2 U1.G8 | length 8.2
  Top Layer w0.102: U1.G8@136.069,71.366 v1(136.569,71.866) ; U1.G8@136.069,71.54 ccw(c136.069,71.961) 136.367,71.663 ccw(c136.664,71.366) U1.G8@136.243,71.366 ; 136.271,71.568 ccw(c135.974,71.866) v1@136.395,71.866 ; 136.272,71.569 cw(c136.569,71.272) v1@136.569,71.692
  Bottom Layer w0.102: FB1.2@136.042,71.366 C8.2@137.135,71.366 ; FB1.2@136.111,71.512 ccw(c136.464,71.865) 136.464,71.366 ; FB1.2@136.183,71.302 cw(c136.337,71.148) 136.337,71.366 ; FB1.2@136.183,71.584 ccw(c136.709,72.11) 136.709,71.366 ; v1@136.446,71.743 cw(c136.148,71.445) 136.569,71.445 cw(c136.99,71.445) v1@136.692,71.743 ; 136.468,71.366 ccw(c136.468,72.11) C8.2@136.994,71.584 ; 136.569,71.373 v1(136.569,71.866) ; 136.713,71.366 ccw(c136.713,71.865) C8.2@137.066,71.512 ; 136.84,71.366 cw(c136.84,71.148) C8.2@136.994,71.302
  Bottom Layer w0.254: C13.1@135.984,72.365 136.569,71.779 v1(136.569,71.866) ; C13.1@136.157,72.365 ccw(c136.574,72.365) 136.279,72.069 ; 136.254,72.095 ccw(c136.569,72.41) v1@136.569,71.964
NetD4_1: D4.1 USB1.1 | length 4.2
  Top Layer w0.381: USB1.1@88.875,91.592 D4.1@91.77,91.593 ; 90.612,91.592 ccw(c90.612,92.401) D4.1@91.184,91.829 ; 90.613,91.592 cw(c90.613,90.786) D4.1@91.184,91.356
NetD5_1: D5.1 LS1.2 Q1.1 | length 10.8
  Top Layer w0.254: D5.1@124.179,84.808 cw(c123.088,83.718) 124.63,83.718 ; D5.1@124.358,84.988 cw(c123.701,84.331) 124.63,84.331 ; D5.1@124.46,85.09 LS1.2@126.802,85.09 ; Q1.1@124.508,81.885 ccw(c124.213,82.18) 124.63,82.18 ccw(c125.048,82.18) Q1.1@124.753,81.885 ; Q1.1@124.63,81.763 D5.1@124.63,84.919 ; 124.63,84.54 cw(c125.009,84.54) D5.1@124.741,84.808 ; D5.1@125.091,84.808 cw(c125.771,84.129) 125.771,85.09 cw(c125.771,86.051) D5.1@125.091,85.371 ; 125.967,85.09 cw(c125.967,84.007) LS1.2@126.733,84.773
NetL1_1: L1.1 R9.1 | length 5.2
  Top Layer w0.254: L1.1@118.684,78.584 cw(c118.048,77.947) 118.948,77.947 cw(c119.849,77.947) L1.1@119.212,78.584 ; v1@118.863,77.824 ccw(c118.526,78.018) 118.902,78.119 ; v1@118.879,77.844 ccw(c118.712,78.011) 118.948,78.011 ccw(c119.185,78.011) v1@119.017,77.844 ; v1(118.948,77.775) L1.1@118.948,78.848 ; 118.994,78.119 ccw(c119.37,78.018) v1@119.033,77.824
  Bottom Layer w0.254: R9.1@118.784,78.104 cw(c118.536,77.775) v1(118.948,77.775) ; v1@118.879,77.844 ccw(c118.712,78.011) 118.948,78.011 ccw(c119.185,78.011) v1@119.017,77.844 ; R9.1@118.948,78.322 v1(118.948,77.775) ; R9.1@119.113,78.104 ccw(c119.361,77.775) v1(118.948,77.775)
NetL2_1: L2.1 R1.1 | length 5.2
  Top Layer w0.254: L2.1@115.738,78.584 cw(c115.101,77.947) 116.002,77.947 cw(c116.902,77.947) L2.1@116.266,78.584 ; v1@115.917,77.824 ccw(c115.58,78.018) 115.956,78.119 ; v1@115.933,77.844 ccw(c115.765,78.011) 116.002,78.011 ccw(c116.238,78.011) v1@116.071,77.844 ; v1(116.002,77.775) L2.1@116.002,78.848 ; 116.048,78.119 ccw(c116.424,78.018) v1@116.087,77.824
  Bottom Layer w0.254: R1.1@115.837,78.104 cw(c115.589,77.775) v1(116.002,77.775) ; v1@115.933,77.844 ccw(c115.765,78.011) 116.002,78.011 ccw(c116.238,78.011) v1@116.071,77.844 ; R1.1@116.002,78.322 v1(116.002,77.775) ; R1.1@116.166,78.104 ccw(c116.414,77.775) v1(116.002,77.775)
NetL4_2: L4.2 R34.2 | length 3.4
  Top Layer w0.254: R34.2@86.857,83.414 L4.2@88.175,83.414 ; R34.2@87.05,83.221 cw(c87.516,82.755) 87.516,83.414 ; R34.2@87.05,83.607 ccw(c87.516,84.073) 87.516,83.414 ; L4.2@87.982,83.221 ccw(c87.516,82.755) 87.516,83.414 ; L4.2@87.982,83.607 cw(c87.516,84.073) 87.516,83.414
NetL5_2: L5.2 R42.2 | length 3.2
  Top Layer w0.33: L5.2@108.472,76.225 R42.2@109.866,76.225 ; L5.2@108.638,76.059 cw(c109.039,75.658) 109.039,76.225 cw(c109.039,76.792) L5.2@108.638,76.392 ; R42.2@109.7,76.059 ccw(c109.299,75.658) 109.299,76.225 ccw(c109.299,76.792) R42.2@109.7,76.391
NetLED1_2: LED1.2 R32.1 | length 4.5
  Bottom Layer w0.152: R32.1@120.446,89.927 cw(c119.894,89.374) 120.675,89.374 cw(c121.457,89.374) R32.1@120.904,89.927 ; LED1.2@120.46,88.912 ccw(c119.94,89.433) 120.675,89.433 ccw(c121.411,89.433) LED1.2@120.891,88.912 ; R32.1@120.554,90.035 cw(c120.262,89.742) 120.675,89.742 cw(c121.089,89.742) R32.1@120.797,90.035 ; LED1.2@120.675,88.697 R32.1@120.675,90.156
NetP5_5: P5.5 R26.8 | length 12.6
  Top Layer w0.102: R26.8@156.456,85.204 160.489,85.204 ; R26.8@156.508,85.151 cw(c156.635,85.024) 156.635,85.204 cw(c156.635,85.383) R26.8@156.508,85.256 ; P5.5@160.848,86.195 cw(c159.611,86.082) 160.489,85.204 ; P5.5@160.949,86.204 cw(c159.892,86.107) 160.643,85.357 cw(c161.393,84.607) P5.5@161.49,85.663 ; P5.5@161.05,86.213 cw(c160.173,86.133) 160.796,85.51 cw(c161.419,84.887) P5.5@161.499,85.764 ; P5.5@161.151,86.222 cw(c160.454,86.159) 160.949,85.663 cw(c161.444,85.168) P5.5@161.508,85.866 ; P5.5@161.48,85.562 ccw(c161.367,84.326) 160.489,85.204 ; P5.5@161.544,86.258 160.489,85.204
NetP5_6: P5.6 R50.1 | length 11.5
  Top Layer w0.102: R50.1@156.456,89.014 157.646,89.014 157.963,88.697 157.963,87.3 ; R50.1@156.508,88.961 cw(c156.635,88.834) 156.635,89.014 cw(c156.635,89.193) R50.1@156.508,89.066 ; P5.6@158.308,86.329 ccw(c157.113,86.45) 157.963,87.3 ; P5.6@158.409,86.319 ccw(c157.388,86.422) 158.114,87.148 ccw(c158.84,87.874) P5.6@158.944,86.853 ; P5.6@158.511,86.308 ccw(c157.663,86.395) 158.265,86.997 ccw(c158.868,87.6) P5.6@158.954,86.752 ; P5.6@158.612,86.298 ccw(c157.937,86.367) 158.417,86.846 ccw(c158.896,87.325) P5.6@158.964,86.651 ; P5.6@158.933,86.954 cw(c158.812,88.149) 157.963,87.3 ; P5.6@159.004,86.258 157.963,87.3
NetP5_7: P5.7 R26.6 | length 16.7
  Top Layer w0.102: R26.6@156.456,85.704 v1(157.07,85.704) ; R26.6@156.508,85.651 cw(c156.635,85.524) 156.635,85.704 cw(c156.635,85.883) R26.6@156.508,85.756 ; v1@156.946,85.58 ccw(c156.649,85.283) 156.649,85.704 ccw(c156.649,86.124) v1@156.946,85.827
  Bottom Layer w0.102: v1(157.07,85.704) 157.484,85.704 ; v1@157.194,85.582 cw(c157.484,85.298) 157.484,85.704 ; v1@157.194,85.825 ccw(c157.484,86.109) 157.484,85.704 ; P5.7@160.845,88.798 cw(c159.157,88.798) 160.35,87.605 cw(c161.544,86.411) P5.7@161.544,88.099 ; P5.7@160.946,88.798 cw(c159.504,88.798) 160.524,87.778 cw(c161.544,86.758) P5.7@161.544,88.201 ; P5.7@161.048,88.798 cw(c159.851,88.798) 160.697,87.952 cw(c161.544,87.105) P5.7@161.544,88.302 ; P5.7@161.15,88.798 cw(c160.197,88.798) 160.871,88.125 cw(c161.544,87.452) P5.7@161.544,88.404 ; P5.7@161.544,88.798 160.274,87.528 158.521,87.528 157.709,86.716 157.709,85.928 157.484,85.704
NetP5_8: P5.8 R50.3 | length 4.8
  Top Layer w0.102: R50.3@156.456,89.514 158.289,89.514 ; R50.3@156.508,89.461 cw(c156.635,89.334) 156.635,89.514 cw(c156.635,89.693) R50.3@156.508,89.566 ; P5.8@158.367,89.086 ccw(c158.019,89.244) 158.289,89.514 ; P5.8@158.459,89.044 ccw(c158.162,89.179) 158.393,89.41 ccw(c158.624,89.64) P5.8@158.758,89.343 ; P5.8@158.716,89.436 cw(c158.559,89.784) 158.289,89.514 ; P5.8@159.004,88.798 158.289,89.514
NetP5_9: P5.9 R26.4 | length 19.3
  Top Layer w0.102: R26.4@156.508,86.151 cw(c156.635,86.024) 156.635,86.204 cw(c156.635,86.383) R26.4@156.508,86.256 ; 156.68,86.204 ccw(c156.68,86.654) v1@157.019,86.357 ; v1@156.943,86.424 cw(c156.456,86.851) R26.4@156.456,86.204 156.968,86.204 v1(157.074,86.309)
  Bottom Layer w0.102: v1@156.95,86.432 ccw(c156.653,86.73) 157.074,86.73 ccw(c157.494,86.73) v1@157.197,86.432 ; v1(157.074,86.309) 157.074,89.535 157.607,90.068 160.274,90.068 P5.9@161.544,91.338 ; P5.9@160.845,91.338 cw(c159.157,91.338) 160.35,90.145 cw(c161.544,88.951) P5.9@161.544,90.639 ; P5.9@160.946,91.338 cw(c159.504,91.338) 160.524,90.318 cw(c161.544,89.298) P5.9@161.544,90.741 ; P5.9@161.048,91.338 cw(c159.851,91.338) 160.697,90.492 cw(c161.544,89.645) P5.9@161.544,90.842 ; P5.9@161.15,91.338 cw(c160.197,91.338) 160.871,90.665 cw(c161.544,89.992) P5.9@161.544,90.944
NetP5_10: P5.10 R50.5 | length 11.7
  Top Layer w0.102: R50.5@156.456,90.014 157.679,90.014 P5.10@159.004,91.338 ; R50.5@156.508,89.961 cw(c156.635,89.834) 156.635,90.014 cw(c156.635,90.193) R50.5@156.508,90.066 ; P5.10@158.305,91.338 cw(c156.617,91.338) 157.81,90.145 cw(c159.004,88.951) P5.10@159.004,90.639 ; P5.10@158.406,91.338 cw(c156.964,91.338) 157.984,90.318 cw(c159.004,89.298) P5.10@159.004,90.741 ; P5.10@158.508,91.338 cw(c157.311,91.338) 158.157,90.492 cw(c159.004,89.645) P5.10@159.004,90.842 ; P5.10@158.61,91.338 cw(c157.657,91.338) 158.331,90.665 cw(c159.004,89.992) P5.10@159.004,90.944
NetP5_11: P5.11 R26.2 | length 21
  Top Layer w0.102: v1@156.333,87.143 cw(c156.035,86.846) 156.456,86.846 cw(c156.877,86.846) v1@156.579,87.143 ; R26.2@156.404,86.781 ccw(c156.277,86.908) 156.456,86.908 ccw(c156.635,86.908) R26.2@156.508,86.781 ; R26.2@156.456,86.704 v1(156.456,87.266)
  Bottom Layer w0.102: v1@156.333,87.39 ccw(c156.035,87.687) 156.456,87.687 ccw(c156.877,87.687) v1@156.579,87.39 ; v1(156.456,87.266) 156.456,91.864 157.201,92.608 160.274,92.608 P5.11@161.544,93.878 ; P5.11@160.845,93.878 cw(c159.157,93.878) 160.35,92.685 cw(c161.544,91.491) P5.11@161.544,93.179 ; P5.11@160.946,93.878 cw(c159.504,93.878) 160.524,92.858 cw(c161.544,91.838) P5.11@161.544,93.281 ; P5.11@161.048,93.878 cw(c159.851,93.878) 160.697,93.032 cw(c161.544,92.185) P5.11@161.544,93.382 ; P5.11@161.15,93.878 cw(c160.197,93.878) 160.871,93.205 cw(c161.544,92.532) P5.11@161.544,93.484
NetP5_12: P5.12 R50.7 | length 13
  Top Layer w0.102: R50.7@156.404,90.591 ccw(c156.277,90.718) 156.456,90.718 ccw(c156.635,90.718) R50.7@156.508,90.591 ; R50.7@156.456,90.514 156.456,91.33 P5.12@159.004,93.878 ; P5.12@158.305,93.878 cw(c156.617,93.878) 157.81,92.685 cw(c159.004,91.491) P5.12@159.004,93.179 ; P5.12@158.406,93.878 cw(c156.964,93.878) 157.984,92.858 cw(c159.004,91.838) P5.12@159.004,93.281 ; P5.12@158.508,93.878 cw(c157.311,93.878) 158.157,93.032 cw(c159.004,92.185) P5.12@159.004,93.382 ; P5.12@158.61,93.878 cw(c157.657,93.878) 158.331,93.205 cw(c159.004,92.532) P5.12@159.004,93.484
NetP7_5: P7.5 R49.1 | length 20.3
  Top Layer w0.089: R49.1@156.399,71.71 cw(c156.262,71.573) 156.456,71.573 cw(c156.65,71.573) R49.1@156.513,71.71 ; R49.1@156.456,71.792 156.456,67.674 157.048,67.081 160.325,67.081 P7.5@161.544,68.301 ; P7.5@160.838,68.301 cw(c159.135,68.301) 160.34,67.096 cw(c161.544,65.892) P7.5@161.544,67.595 ; P7.5@160.927,68.301 cw(c159.439,68.301) 160.491,67.248 cw(c161.544,66.195) P7.5@161.544,67.684 ; P7.5@161.016,68.301 cw(c159.742,68.301) 160.643,67.4 cw(c161.544,66.499) P7.5@161.544,67.773 ; P7.5@161.105,68.301 cw(c160.046,68.301) 160.795,67.551 cw(c161.544,66.802) P7.5@161.544,67.862 ; P7.5@161.194,68.301 cw(c160.349,68.301) 160.947,67.703 cw(c161.544,67.106) P7.5@161.544,67.951
NetP7_6: P7.6 R48.1 | length 19
  Top Layer w0.089: R48.1@156.456,75.399 157.392,75.399 157.505,75.286 157.505,69.799 P7.6@159.004,68.301 ; R48.1@156.513,75.342 cw(c156.65,75.205) 156.65,75.399 cw(c156.65,75.594) R48.1@156.513,75.456 ; P7.6@158.298,68.301 ccw(c156.595,68.301) 157.8,69.505 ccw(c159.004,70.709) P7.6@159.004,69.006 ; P7.6@158.387,68.301 ccw(c156.899,68.301) 157.951,69.353 ccw(c159.004,70.406) P7.6@159.004,68.917 ; P7.6@158.476,68.301 ccw(c157.202,68.301) 158.103,69.202 ccw(c159.004,70.102) P7.6@159.004,68.828 ; P7.6@158.565,68.301 ccw(c157.506,68.301) 158.255,69.05 ccw(c159.004,69.799) P7.6@159.004,68.739 ; P7.6@158.654,68.301 ccw(c157.809,68.301) 158.407,68.898 ccw(c159.004,69.495) P7.6@159.004,68.651
NetP7_7: P7.7 R49.3 | length 18.7
  Top Layer w0.089: R49.3@156.513,72.235 cw(c156.65,72.098) 156.65,72.292 cw(c156.65,72.487) R49.3@156.513,72.349 ; 156.606,72.292 cw(c156.606,71.909) v1@156.942,72.092 ; 156.755,72.292 cw(c156.755,71.99) v1@157.02,72.135 ; v1@156.864,72.05 ccw(c156.456,71.828) R49.3@156.456,72.292 156.866,72.292 v1(157.023,72.136)
  Bottom Layer w0.089: v1@156.895,72.008 cw(c156.587,71.7) 157.023,71.7 cw(c157.459,71.7) v1@157.15,72.008 ; v1(157.023,72.136) 157.023,69.85 157.12,69.752 160.456,69.752 ; P7.7@160.84,70.788 cw(c159.519,70.69) 160.456,69.752 ; P7.7@160.929,70.795 cw(c159.774,70.709) 160.593,69.89 cw(c161.412,69.07) P7.7@161.498,70.226 ; P7.7@161.018,70.801 cw(c160.029,70.728) 160.73,70.027 cw(c161.431,69.326) P7.7@161.505,70.314 ; P7.7@161.106,70.808 cw(c160.284,70.747) 160.867,70.164 cw(c161.45,69.581) P7.7@161.511,70.403 ; P7.7@161.195,70.815 cw(c160.539,70.766) 161.004,70.301 cw(c161.469,69.836) P7.7@161.518,70.492 ; P7.7@161.492,70.137 ccw(c161.393,68.815) 160.456,69.752 ; P7.7@161.544,70.841 160.456,69.752
NetP7_8: P7.8 R48.3 | length 17
  Top Layer w0.089: R48.3@156.456,75.899 157.451,75.899 157.759,75.59 157.759,72.085 P7.8@159.004,70.841 ; R48.3@156.513,75.842 cw(c156.65,75.705) 156.65,75.899 cw(c156.65,76.094) R48.3@156.513,75.956 ; P7.8@158.298,70.841 ccw(c156.595,70.841) 157.8,72.045 ccw(c159.004,73.249) P7.8@159.004,71.546 ; P7.8@158.387,70.841 ccw(c156.899,70.841) 157.951,71.893 ccw(c159.004,72.946) P7.8@159.004,71.457 ; P7.8@158.476,70.841 ccw(c157.202,70.841) 158.103,71.742 ccw(c159.004,72.642) P7.8@159.004,71.368 ; P7.8@158.565,70.841 ccw(c157.506,70.841) 158.255,71.59 ccw(c159.004,72.339) P7.8@159.004,71.279 ; P7.8@158.654,70.841 ccw(c157.809,70.841) 158.407,71.438 ccw(c159.004,72.035) P7.8@159.004,71.191
NetP7_9: P7.9 R49.5 | length 17.6
  Top Layer w0.089: R49.5@156.456,72.792 v1(157.023,72.792) ; R49.5@156.513,72.735 cw(c156.65,72.598) 156.65,72.792 cw(c156.65,72.987) R49.5@156.513,72.849 ; v1@156.895,72.665 ccw(c156.587,72.357) 156.587,72.792 ccw(c156.587,73.228) v1@156.895,72.92
  Bottom Layer w0.089: v1(157.023,72.792) 157.56,72.792 158.217,72.136 160.299,72.136 P7.9@161.544,73.381 ; v1@157.15,72.665 cw(c157.459,72.357) 157.459,72.792 cw(c157.459,73.228) v1@157.15,72.92 ; P7.9@160.838,73.381 cw(c159.135,73.381) 160.34,72.176 cw(c161.544,70.972) P7.9@161.544,72.675 ; P7.9@160.927,73.381 cw(c159.439,73.381) 160.491,72.328 cw(c161.544,71.275) P7.9@161.544,72.764 ; P7.9@161.016,73.381 cw(c159.742,73.381) 160.643,72.48 cw(c161.544,71.579) P7.9@161.544,72.853 ; P7.9@161.105,73.381 cw(c160.046,73.381) 160.795,72.631 cw(c161.544,71.882) P7.9@161.544,72.942 ; P7.9@161.194,73.381 cw(c160.349,73.381) 160.947,72.783 cw(c161.544,72.186) P7.9@161.544,73.031
NetP7_10: P7.10 R48.5 | length 11.3
  Top Layer w0.089: R48.5@156.456,76.399 157.611,76.399 158.013,75.997 158.013,74.371 ; R48.5@156.513,76.342 cw(c156.65,76.205) 156.65,76.399 cw(c156.65,76.594) R48.5@156.513,76.456 ; P7.10@158.306,73.484 ccw(c157.28,73.637) 158.013,74.371 ; P7.10@158.394,73.471 ccw(c157.497,73.605) 158.138,74.246 ccw(c158.78,74.888) P7.10@158.913,73.991 ; P7.10@158.482,73.458 ccw(c157.714,73.573) 158.263,74.122 ccw(c158.812,74.67) P7.10@158.926,73.903 ; P7.10@158.57,73.445 ccw(c157.931,73.54) 158.388,73.997 ccw(c158.844,74.453) P7.10@158.939,73.815 ; P7.10@158.9,74.078 cw(c158.747,75.105) 158.013,74.371 ; P7.10@159.004,73.381 158.013,74.371
NetP7_11: P7.11 R49.7 | length 18.5
  Top Layer w0.089: v1@156.328,73.804 cw(c156.02,73.496) 156.456,73.496 cw(c156.892,73.496) v1@156.584,73.804 ; R49.7@156.399,73.374 ccw(c156.262,73.512) 156.456,73.512 ccw(c156.65,73.512) R49.7@156.513,73.374 ; R49.7@156.456,73.292 v1(156.456,73.931)
  Bottom Layer w0.089: v1@156.328,74.059 ccw(c156.02,74.367) 156.456,74.367 ccw(c156.892,74.367) v1@156.584,74.059 ; v1(156.456,73.931) 156.456,74.439 156.693,74.676 160.299,74.676 P7.11@161.544,75.921 ; P7.11@160.838,75.921 cw(c159.135,75.921) 160.34,74.716 cw(c161.544,73.512) P7.11@161.544,75.215 ; P7.11@160.927,75.921 cw(c159.439,75.921) 160.491,74.868 cw(c161.544,73.815) P7.11@161.544,75.304 ; P7.11@161.016,75.921 cw(c159.742,75.921) 160.643,75.02 cw(c161.544,74.119) P7.11@161.544,75.393 ; P7.11@161.105,75.921 cw(c160.046,75.921) 160.795,75.171 cw(c161.544,74.422) P7.11@161.544,75.482 ; P7.11@161.194,75.921 cw(c160.349,75.921) 160.947,75.323 cw(c161.544,74.726) P7.11@161.544,75.571
NetP7_12: P7.12 R48.7 | length 9.4
  Top Layer w0.089: R48.7@156.456,76.899 158.025,76.899 ; R48.7@156.513,76.842 cw(c156.65,76.705) 156.65,76.899 cw(c156.65,77.094) R48.7@156.513,76.956 ; P7.12@158.307,76.031 ccw(c157.315,76.189) 158.025,76.899 ; P7.12@158.395,76.017 ccw(c157.528,76.155) 158.149,76.776 ccw(c158.769,77.397) P7.12@158.907,76.53 ; P7.12@158.483,76.003 ccw(c157.741,76.121) 158.272,76.653 ccw(c158.803,77.184) P7.12@158.921,76.442 ; P7.12@158.571,75.989 ccw(c157.954,76.087) 158.395,76.529 ccw(c158.837,76.971) P7.12@158.935,76.354 ; P7.12@158.893,76.617 cw(c158.736,77.609) 158.025,76.899 ; P7.12@159.004,75.921 158.025,76.899
NetP8_5: P8.5 R52.1 | length 19.1
  Top Layer w0.089: R52.1@156.399,52.279 cw(c156.262,52.142) 156.456,52.142 cw(c156.65,52.142) R52.1@156.513,52.279 ; R52.1@156.456,52.361 156.456,49.335 156.718,49.073 160.274,49.073 P8.5@161.544,50.343 ; P8.5@160.838,50.343 cw(c159.135,50.343) 160.34,49.138 cw(c161.544,47.934) P8.5@161.544,49.637 ; P8.5@160.927,50.343 cw(c159.439,50.343) 160.491,49.29 cw(c161.544,48.237) P8.5@161.544,49.726 ; P8.5@161.016,50.343 cw(c159.742,50.343) 160.643,49.442 cw(c161.544,48.541) P8.5@161.544,49.815 ; P8.5@161.105,50.343 cw(c160.046,50.343) 160.795,49.594 cw(c161.544,48.844) P8.5@161.544,49.904 ; P8.5@161.194,50.343 cw(c160.349,50.343) 160.947,49.745 cw(c161.544,49.148) P8.5@161.544,49.993
NetP8_6: P8.6 R51.1 | length 17.5
  Top Layer w0.089: R51.1@156.456,56.019 157.265,56.019 157.683,55.601 157.683,51.664 P8.6@159.004,50.343 ; R51.1@156.513,55.962 cw(c156.65,55.825) 156.65,56.019 cw(c156.65,56.213) R51.1@156.513,56.076 ; P8.6@158.298,50.343 ccw(c156.595,50.343) 157.8,51.547 ccw(c159.004,52.752) P8.6@159.004,51.048 ; P8.6@158.387,50.343 ccw(c156.899,50.343) 157.951,51.395 ccw(c159.004,52.448) P8.6@159.004,50.959 ; P8.6@158.476,50.343 ccw(c157.202,50.343) 158.103,51.244 ccw(c159.004,52.145) P8.6@159.004,50.871 ; P8.6@158.565,50.343 ccw(c157.506,50.343) 158.255,51.092 ccw(c159.004,51.841) P8.6@159.004,50.782 ; P8.6@158.654,50.343 ccw(c157.809,50.343) 158.407,50.94 ccw(c159.004,51.538) P8.6@159.004,50.693
NetP8_7: P8.7 R52.3 | length 17.8
  Top Layer w0.089: R52.3@156.456,52.861 v1(157.095,52.861) ; R52.3@156.513,52.804 cw(c156.65,52.667) 156.65,52.861 cw(c156.65,53.056) R52.3@156.513,52.918 ; v1@156.967,52.734 ccw(c156.659,52.426) 156.659,52.861 ccw(c156.659,53.297) v1@156.967,52.989
  Bottom Layer w0.089: v1@157.095,52.681 cw(c157.095,52.245) 157.403,52.553 cw(c157.711,52.861) v1@157.276,52.861 ; v1(157.095,52.861) 158.293,51.664 160.325,51.664 P8.7@161.544,52.883 ; P8.7@160.838,52.883 cw(c159.135,52.883) 160.34,51.678 cw(c161.544,50.474) P8.7@161.544,52.177 ; P8.7@160.927,52.883 cw(c159.439,52.883) 160.491,51.83 cw(c161.544,50.777) P8.7@161.544,52.266 ; P8.7@161.016,52.883 cw(c159.742,52.883) 160.643,51.982 cw(c161.544,51.081) P8.7@161.544,52.355 ; P8.7@161.105,52.883 cw(c160.046,52.883) 160.795,52.134 cw(c161.544,51.384) P8.7@161.544,52.444 ; P8.7@161.194,52.883 cw(c160.349,52.883) 160.947,52.285 cw(c161.544,51.688) P8.7@161.544,52.533